# Altium PCB OpenAXES.PcbDoc (part 1 of 2)
Units mm, origin at the board's own origin, x right, y up, seen from the top; angles counter-clockwise.
Board outline 34.5 x 18 mm, 4 copper layers (L1, L2, L3, L4), stack 0.956 mm thick; 99 components, 71 nets, 369 pads, 165 vias.
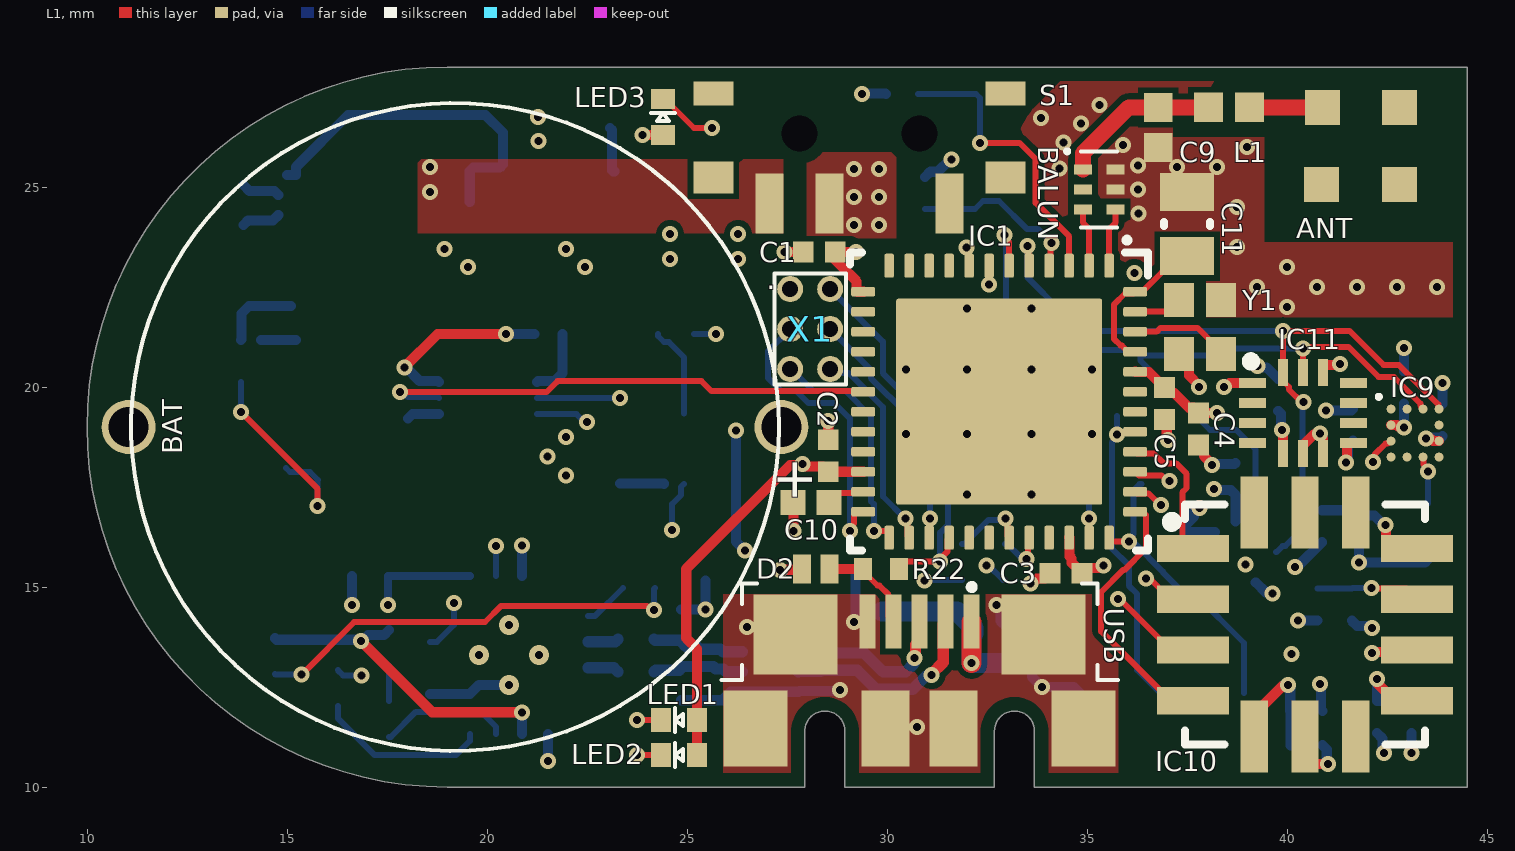
[diagram p0: L1 view]
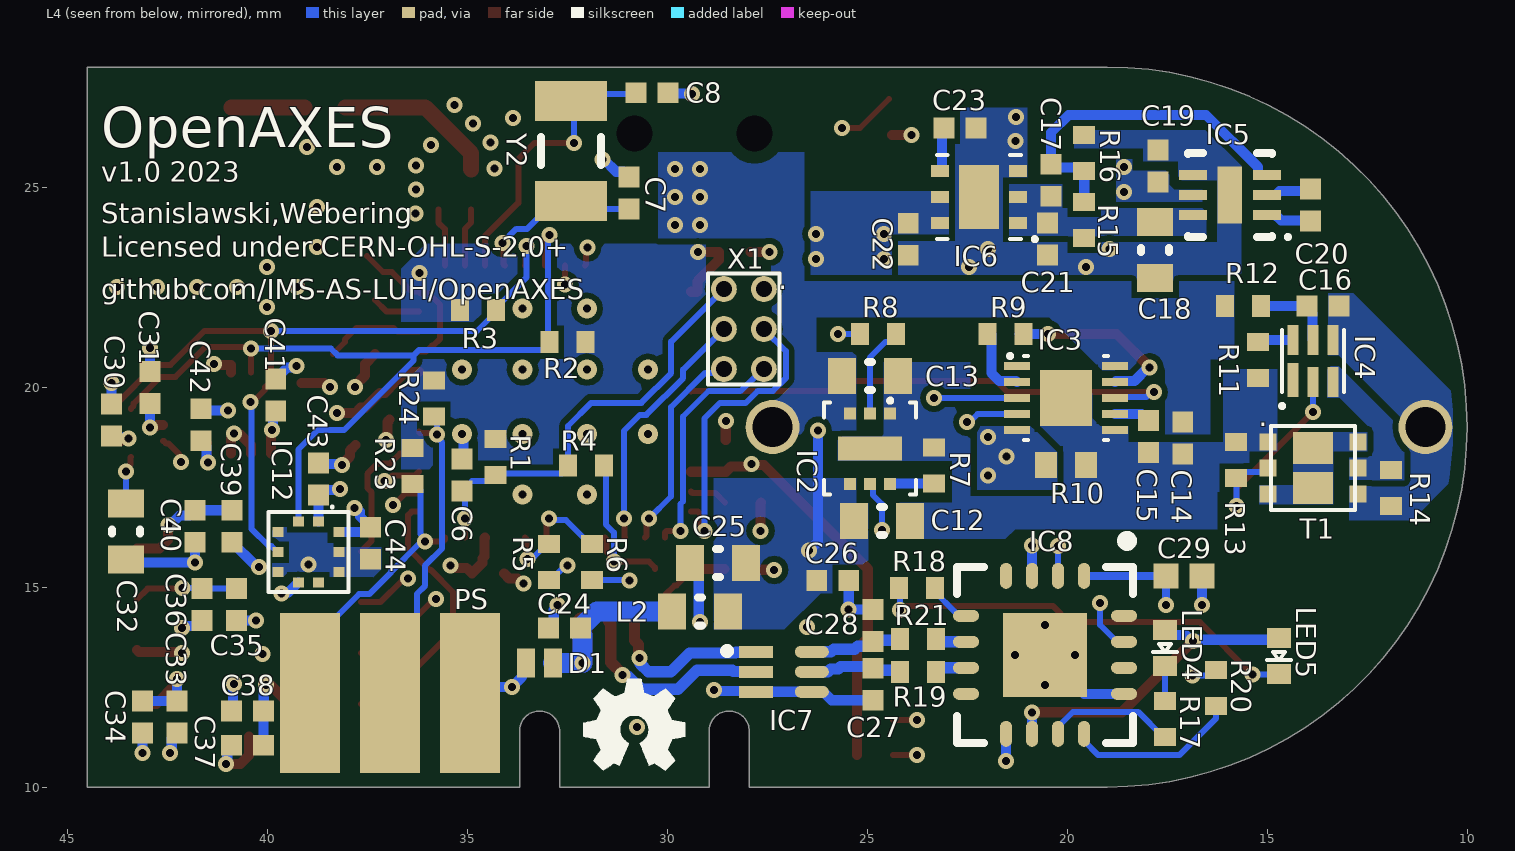
[diagram p1: L4 view, seen from below]
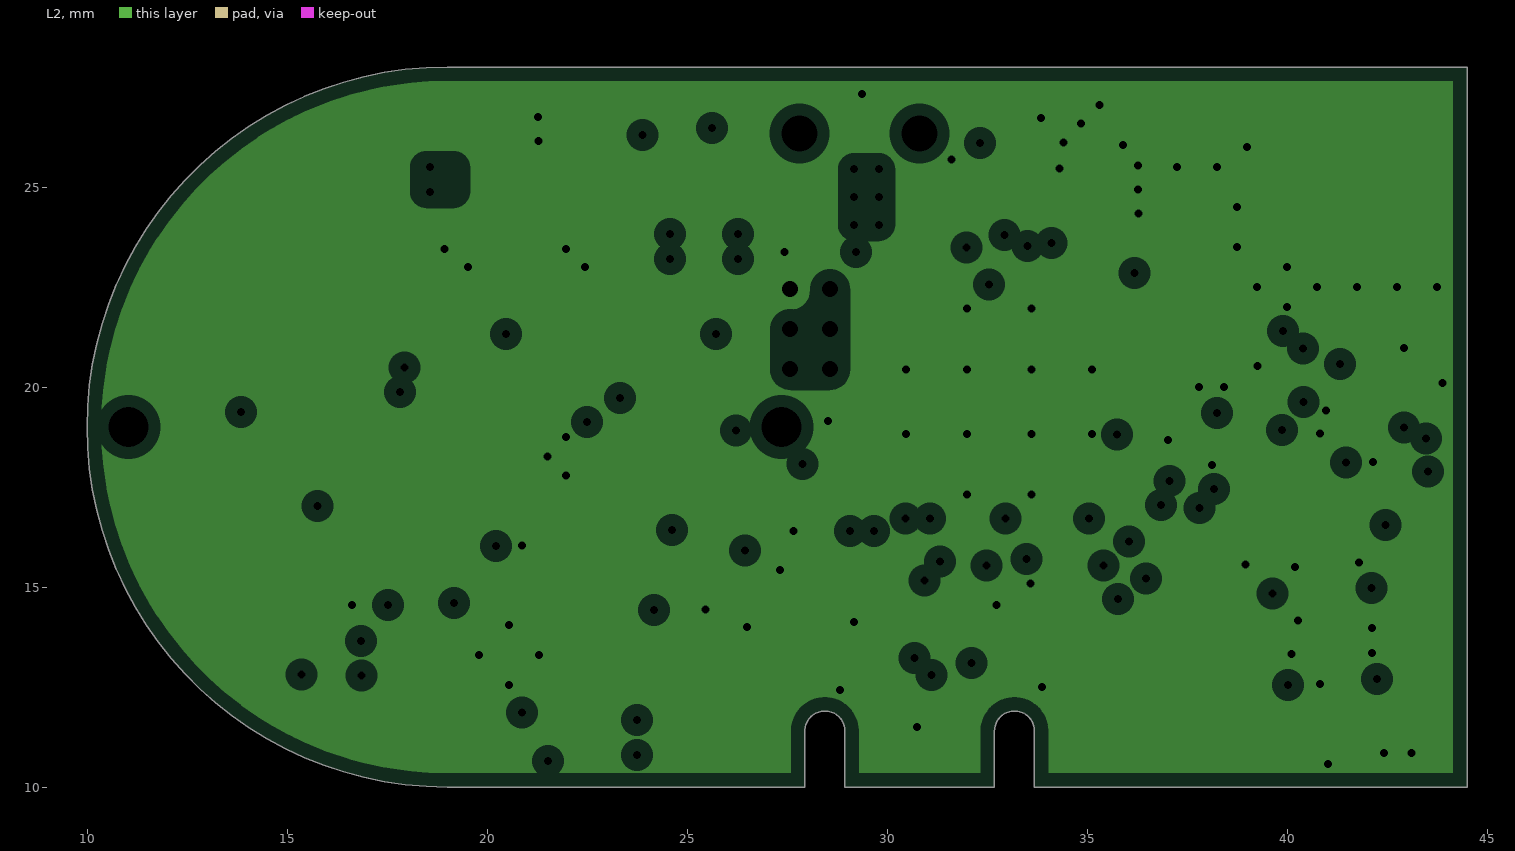
[diagram p2: L2, clearances drawn from the general rule]
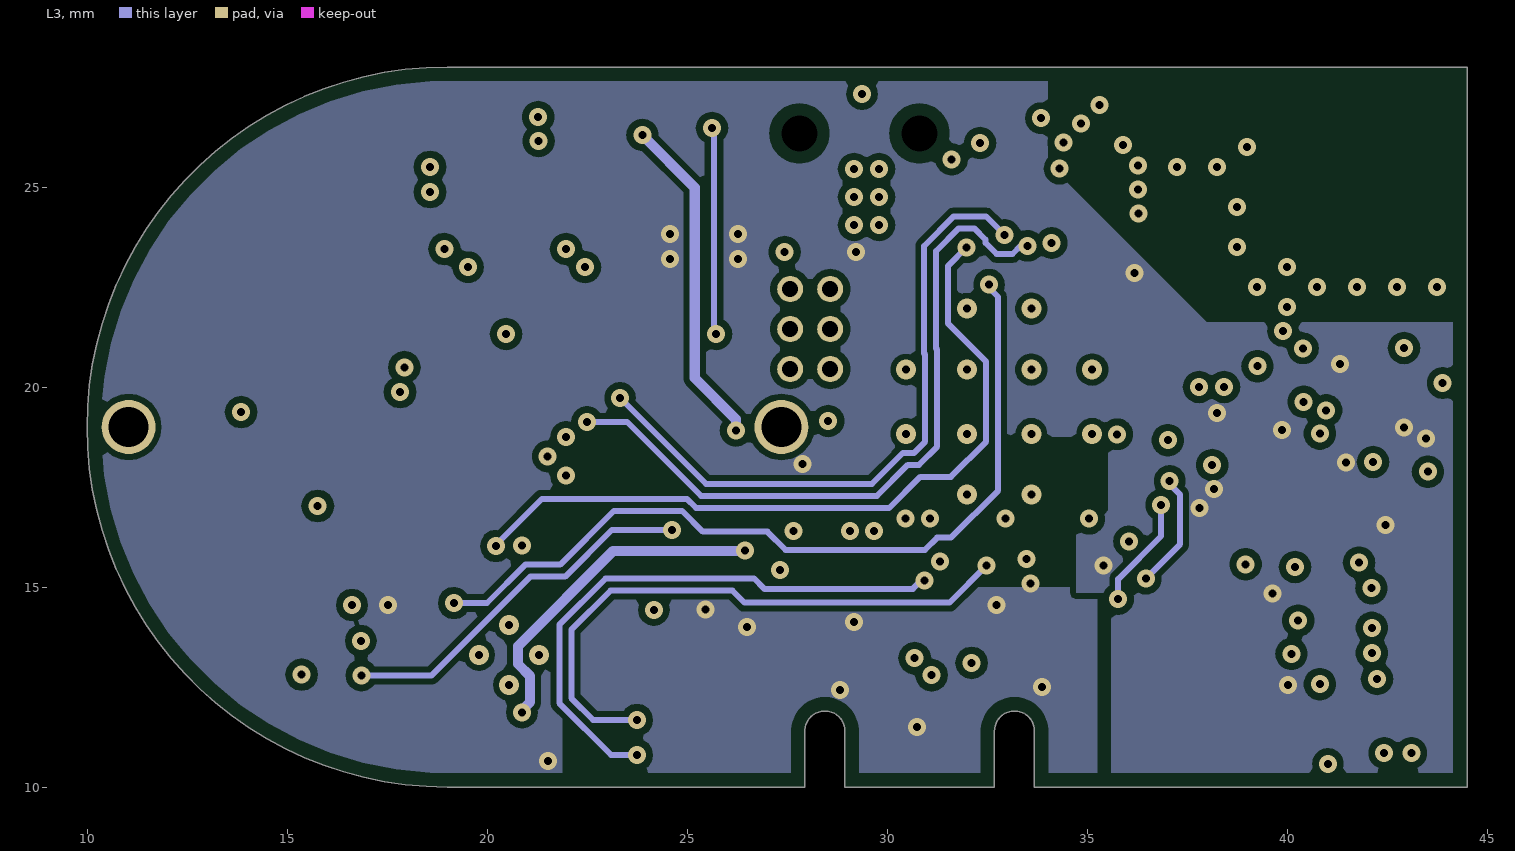
[diagram p3: L3]

## Layer stack, top to bottom
Top Solder: solder mask 0.0102, Solder Resist, Dk 3.5
L1: signal copper 0.035
Dielectric 1: prepreg 0.115, PP-016, Dk 4.4
Dielectric 2: prepreg 0.115, PP-016, Dk 4.4
L2: plane copper 0.035, net GND
Dielectric 3: core 0.3556, Core-032, Dk 4.7
L3: signal copper 0.035
Dielectric 4: prepreg 0.115, PP-016, Dk 4.4
Dielectric 5: prepreg 0.115, PP-016, Dk 4.4
L4: signal copper 0.035
Solder Side: solder mask 0.0102, Solder Resist, Dk 3.5

## Board outline
24.816,10 27.946,10 27.946,11.4 cw(c28.446,11.4) 28.446,11.9 cw(c28.446,11.4) 28.946,11.4 28.946,10 32.686,10 32.686,11.4 cw(c33.186,11.4) 33.186,11.9 cw(c33.186,11.4) 33.686,11.4 33.686,10 44.5,10 44.5,28 19,28 ccw(c19,19) 19,10

## Design rules (kind name [scope] priority, off if disabled: settings)
BoardOutlineClearance BoardOutlineClearance_Exceptions [InComponent('BAT1') or InComponent('S1')] p1: gap=0.15 ignorepadtopadclearanceinfootprint=FALSE
BoardOutlineClearance [All] p2: gap=0.35 ignorepadtopadclearanceinfootprint=FALSE except(0.254: Text-OutlineEdge Text-CavityEdge Text-CutoutEdge Text-SplitBarrior Text-SplitContinuation)
Clearance Clearance_NPTHoles [(HoleDiameter > 0) AND (PadIsPlated = 'False')] p1: gap=0.3 ignorepadtopadclearanceinfootprint=FALSE
Clearance ClearanceL3Traces [IsTrack and (Layer = 'L3')] p2: gap=0.15 ignorepadtopadclearanceinfootprint=FALSE except(0.3: Arc-THPad Arc-Hole Track-THPad Track-Hole SMDPad-THPad SMDPad-Hole THPad-THPad THPad-Hole Via-Hole Fill-Hole Poly-Hole Region-Hole Text-Hole)
Clearance ClearanceL3Polygons [InNamedPolygon('+3V3_L03_P056') OR InNamedPolygon('+3V3_L03_P046') OR  InNamedPolygon('GND_L03_P060')] p3: gap=0.15 ignorepadtopadclearanceinfootprint=FALSE except(0.3: Arc-Via Arc-Hole Track-Via Track-Hole SMDPad-Via THPad-Via Via-Hole Fill-Hole Poly-Hole Region-Hole)
Clearance [All] p4: gap=0.15 ignorepadtopadclearanceinfootprint=FALSE
Clearance Clearance_ViaSameNet [IsVia AND (not IsComponentPrimitive)] p5: gap=0 ignorepadtopadclearanceinfootprint=TRUE except(0.01: SMDPad-Hole; 0.15: Via-Via)
Clearance Clearance_ShieldingVia [IsShieldingVia] p6: gap=0.15 ignorepadtopadclearanceinfootprint=TRUE
DiffPairsRouting DiffPairsRoutingUSB [InDifferentialPair('USB_D') or InDifferentialPair('USBD') or InDifferentialPair('D')] p1: maxlimit=0.15 minlimit=0.127 mostfreqgap=0.15 toplayer_minwidth=0.253 toplayer_maxwidth=0.284 toplayer_prefwidth=0.281 midlayer4_maxgap=0.127 midlayer4_prefgap=0.127 midlayer4_minwidth=0.095 midlayer4_maxwidth=0.096 midlayer4_prefwidth=0.096 bottomlayer_mingap=0.15 bottomlayer_minwidth=0.276 bottomlayer_maxwidth=0.284 bottomlayer_prefwidth=0.281 impedanceprofiledriven=TRUE impedanceprofileid={C6F5AE27-A041-4408-8983-9D974821A2F9} impedanceprofilevalue=90.000000 maxuncoupledlength=12.7
HoleSize [All] p1: absolutevalues=TRUE maxlimit=3.2 minlimit=0.2 maxpercent=80.000 minpercent=20.000
MaxMinImpedance "Schematic Impedance Constraint" [InNetClass('S50')] p1: minimum=45.00 maximum=55.00
MaxMinImpedance [InNetClass('DIFF90')] p2: minimum=81.00 maximum=99.00
MinimumAnnularRing [((ObjectKind = 'Pad') OR (ObjectKind = 'Via')) And (Layer = 'MultiLayer')] p1: minimumring=0.1
MinimumSolderMaskSliver [All] p1: minsoldermaskwidth=0.1
PlaneClearance [All] p1: clearance=0.3
PlaneConnect [All] p1: planeconnectstyle=Direct reliefexpansion=0.508 reliefentries=4 reliefconductorwidth=0.254 reliefairgap=0.254
PolygonConnect [All] p1: connectstyle=Direct reliefconductorwidth=0.254 reliefentries=4 polygonreliefangle="90 Angle" airgapwidth=0.254
RoutingVias [All] p1: holewidth=0.3 width=0.6 viastyle="Through Hole" minholewidth=0.2 minwidth=0.4 maxholewidth=0.711 maxwidth=1.27 useviatemplates=TRUE viatemplateguid#1={DDB32D80-8653-42E7-85F9-05E0B8A0FFCF} viatemplatename#1=v40h20z0
SilkToSilkClearance [All] p1: silktosilkclearance=0
SilkToSolderMaskClearance [IsPad] p1: minsilkscreentomaskgap=0.01 clearancetoexposedcopper=TRUE
SolderMaskExpansion SolderMaskExpansion_1 [IsVia] p1: expansion=-2 istentingtop=FALSE
SolderMaskExpansion [All] p2: expansion=0 istentingtop=FALSE
Width Impedance_50Ohm [InNetClass('S50')] p1: maxlimit=0.737 minlimit=0.186 preferedwidth=0.399 toplayer_minwidth=0.35 midlayer4_maxwidth=0.392 midlayer4_prefwidth=0.19 bottomlayer_minwidth=0.388 impedanceprofiledriven=TRUE impedanceprofileid={7875F6EE-BFEB-4626-A73D-AADCFB6D67AE} impedanceprofilevalue=50.000000 minimp=50.000000 maximp=50.000000 favimp=50.000000
Width "Schematic Width Constraint_3" [InNet('+5V')] p2: maxlimit=0.5 minlimit=0.254 preferedwidth=0.254
Width "Schematic Width Constraint_2" [InNet('USB_V+')] p3: maxlimit=0.5 minlimit=0.254 preferedwidth=0.254
Width [All] p4: maxlimit=5 minlimit=0.15 preferedwidth=0.254
23 further rules are at their usual default settings.

## Classes and differential pairs
net class S50: ANT UNBALANCED
component class Sensors: C30 C31 C32 C33 C34 C35 C36 C37 C38 C39 C40 C41 C42 C43 C44 IC9 IC10 IC11 IC12 PS R23 R24
net class DIFF90: D_N D_P USB_D_N USB_D_P USBD_N USBD_P
component class USB2UART: C24 C25 C26 C27 C28 C29 D1 D2 IC7 IC8 L2 LED4 LED5 R17 R18 R19 R20 R21 R22 USB
component class Battery: BAT BAT? C12 C13 C14 C15 C16 C17 C18 C19 C20 C21 C22 C23 IC2 IC3 IC4 IC5 IC6 LED3 R7 R8 R9 R10 R11 R12 R13 R14 R15 R16 S1 T1
component class SoC: ANT BALUN C1 C2 C3 C4 C5 C6 C7 C8 C9 C10 C11 IC1 L1 LED1 LED2 R1 R2 R3 R4 R5 R6 X1 Y1 Y2
differential pair USB_D: +USB_D_P -USB_D_N
differential pair D: +D_P -D_N
differential pair USBD: +USBD_P -USBD_N

## Components (designator, comment, footprint, x,y, rotation, side; value= is the part's Value field where it differs from the comment)
ANT "ANTENNA" MOLEX_47948-0001 41.85,26.025 r90 top locked
BALUN "2450BM14G0011" SON50P80X70-6L 35.304,24.944 r0 top
BAT "CP1654 A3" CP1654 19.2,19 r0 top locked
C1 "100n 16V 0402" CAPC0402(1005)60_L 28.305,23.375 r0 top value=100nF
C2 "100n 16V 0402" CAPC0402(1005)60_L 28.53,18.282 r270 top value=100nF
C3 "100n 16V 0402" CAPC0402(1005)60_L 34.478,15.342 r0 top value=100nF
C4 "10u 6V3 0402" CAPC0402(1005)60_L 37.79,18.95 r90 top value=10uF
C5 "100n 16V 0402" CAPC0402(1005)60_L 36.935,19.585 r90 top value=100nF
C6 "100n 16V 0402" CAPC0402(1005)60_L 35.124,17.8 r270 bottom value=100nF
C7 "12p 10V 0402" CAPC0402(1005)60_L 30.95,24.85 r270 bottom value=12pF
C8 "12p 10V 0402" CAPC0402(1005)60_L 30.375,27.355 r0 bottom value=12pF
C9 "1p3 10V 0402" CAPC0402(1005)60_M 36.779,26.49 r90 top value=1.3pF
C10 "1u 16V 0402" CAPC0402(1005)60_N 28.1,17.11 r0 top value=1uF
C11 "CAP 22u 6.3V 0805" CAPC0805(2012)145_L 37.5,24.075 r270 top value=22uF
C12 "4u7 10V 0603" CAPC0603(1608)100_L 24.625,16.655 r0 bottom value=4.7uF
C13 "4u7 10V 0603" CAPC0603(1608)100_L 24.925,20.275 r0 bottom value=4.7uF
C14 "100n 16V 0402" CAPC0402(1005)60_L 17.107,18.725 r90 bottom value=100nF
C15 "470n 6V3 0402" CAPC0402(1005)60_L 17.961,18.762 r90 bottom value=470nF
C16 "100n 16V 0402" CAPC0402(1005)60_L 13.6,22.025 r0 bottom value=100nF
C17 "220p 10V 0402" CAPC0402(1005)60_L 20.4,25.17 r270 bottom value=220pF
C18 "4u7 10V 0603" CAPC0603(1608)100_L 17.8,23.422 r90 bottom value=4.7uF
C19 "2u2u 6V3 0402" CAPC0402(1005)60_L 17.725,25.525 r270 bottom value=2.2uF
C20 "1u 16V 0402" CAPC0402(1005)60_L 13.91,24.55 r270 bottom value=1uF
C21 "10u 6V3 0402" CAPC0402(1005)60_L 20.485,23.7 r90 bottom value=10uF
C22 "10u 6V3 0402" CAPC0402(1005)60_L 23.968,23.695 r90 bottom value=10uF
C23 "1u 16V 0402" CAPC0402(1005)60_L 22.675,26.475 r180 bottom value=1uF
C24 "10n 16V 0402" CAPC0402(1005)33_L 32.566,13.975 r180 bottom value=10nF
C25 "4u7 10V 0603" CAPC0603(1608)100_L 28.72,15.595 r180 bottom value=4.7uF
C26 "100n 16V 0402" CAPC0402(1005)60_L 25.858,15.16 r0 bottom value=100nF
C27 "47p 16V 0402" CAPC0402(1005)60_L 24.85,12.568 r90 bottom value=47pF
C28 "47p 16V 0402" CAPC0402(1005)60_L 24.85,14.038 r270 bottom value=47pF
C29 "100n 16V 0402" CAPC0402(1005)60_N 17.075,15.278 r0 bottom value=100nF
C30 "1u 16V 0402" CAPC0402(1005)60_L 43.89,19.175 r90 bottom value=1uF
C31 "1u 16V 0402" CAPC0402(1005)60_L 42.925,19.988 r90 bottom value=1uF
C32 "4u7 10V 0603" CAPC0603(1608)100_L 43.522,16.39 r90 bottom value=4.7uF
C33 "100n 16V 0402" CAPC0402(1005)60_L 42.25,11.75 r90 bottom value=100nF
C34 "1u 16V 0402" CAPC0402(1005)60_L 43.11,11.75 r270 bottom value=1uF
C35 "1u 16V 0402" CAPC0402(1005)60_L 40.765,14.56 r270 bottom value=1uF
C36 "100n 16V 0402" CAPC0402(1005)60_L 41.622,14.56 r90 bottom value=100nF
C37 "1u 16V 0402" CAPC0402(1005)60_L 40.488,11.045 r0 bottom value=1uF
C38 "100n 16V 0402" CAPC0402(1005)60_L 40.488,11.9 r180 bottom value=100nF
C39 "1u 16V 0402" CAPC0402(1005)60_L 40.875,16.52 r270 bottom value=1uF
C40 "100n 16V 0402" CAPC0402(1005)60_L 41.8,16.52 r90 bottom value=100nF
C41 "100n 16V 0402" CAPC0402(1005)60_L 39.78,19.8 r270 bottom value=100nF
C42 "100n 16V 0402" CAPC0402(1005)60_L 41.65,19.055 r270 bottom value=100nF
C43 "100n 16V 0402" CAPC0402(1005)60_L 38.715,17.7 r270 bottom value=100nF
C44 "100n 16V 0402" CAPC0402(1005)60_L 37.41,16.095 r90 bottom value=100nF
D1 "TPD1E10B06DPYR" DPY0002A_M 33.19,13.103 r0 bottom
D2 "TPD1E10B06DPYR" DPY0002A_M 28.22,15.45 r180 top
IC1 "CC2652R1FRGZT" RGZ0048A_V 32.804,19.632 r270 top
IC2 "MCP73830/L" PSON50P200X80_HS-7L 24.925,18.457 r270 bottom
IC3 "MAX17055ETB+" PSON40P250X80_HS-11L 20.025,19.725 r180 bottom
IC4 "BQ2970x" SON50P150X80-6L 13.85,20.65 r90 bottom
IC5 "LTC3221EDC" LT-DC6-6_V 15.93,24.8 r0 bottom
IC6 "TPS7A3501" PSON65P200X80_HS-7L 22.205,24.745 r0 bottom
IC7 "ECMF02-2AMX6" SON50P150X170X55-6N-D 27.08,12.88 r180 bottom
IC8 "FT230XQ-R" QFN-16_L 20.55,13.303 r270 bottom
IC9 "MMC3416XPJ" BGA12C40P4X4_160X160X72 43.2,18.85 r0 top
IC10 "ADXL355BEZ" ADI-ADXL355-LCC-14_V 40.45,14.06 r0 top
IC11 "BMI160" BOSC-BMI160_V 40.4,19.35 r0 top
IC12 "BMP388" BMP388 38.965,15.875 r180 bottom
L1 "LQP15MN1N8B02D" INDC1005X45X25ML10T10 38.55,26.99 r0 top
L2 "742792605" 0603(1608)_L 29.18,14.39 r180 bottom
LED1 "GREEN" LED_0402 24.8,11.675 r270 top
LED2 "RED" LED_0402 24.8,10.8 r270 top
LED3 "BLUE" LED_0402 24.4,26.75 r180 top
LED4 "ORANGE" LED_0402 17.55,13.475 r180 bottom
LED5 "YELLOW" LED_0402 14.7,13.27 r180 bottom
PS "PressureSensor" PRESSURESENSOR 36.925,12.35 r270 bottom
R1 "10K 1% 0402" RESC0402(1005)_L 34.293,18.25 r90 bottom value="10000.00 Ohm"
R2 "10K 1% 0402" RESC0402(1005)_L 32.49,21.12 r180 bottom value="10000.00 Ohm"
R3 "10K 1% 0402" RESC0402(1005)_L 34.725,21.925 r0 bottom value="10000.00 Ohm"
R4 "Jumper 0402" RESC0402(1005)_L 32.03,18.04 r180 bottom value="0.00 Ohm"
R5 "3K3 5% 0402" RESC0402(1005)_L 32.955,15.625 r270 bottom value="3300.00 Ohm"
R6 "3K3 5% 0402" RESC0402(1005)_L 31.88,15.625 r270 bottom value="3300.00 Ohm"
R7 "1K2 1% 0402" RESC0402(1005)_L 23.326,18.034 r270 bottom value="1200.00 Ohm"
R8 "3K3 5% 0402" RESC0402(1005)_L 24.725,21.325 r180 bottom value="3300.00 Ohm"
R9 "10K 1% 0402" RESC0402(1005)_L 21.541,21.325 r180 bottom value="10000.00 Ohm"
R10 "0R01 5% 0402" R0402 20.025,18.055 r0 bottom
R11 "2K2 5% 0402" RESC0402(1005)_L 15.225,20.675 r90 bottom value="2200.00 Ohm"
R12 "330R 5% 0402" RESC0402(1005)_L 15.6,22.025 r0 bottom value="330.00 Ohm"
R13 "4M99 1% 0402" RESC0402(1005)_L 15.775,18.175 r270 bottom value="4990000.00 Ohm"
R14 "4M99 1% 0402" RESC0402(1005)_L 11.9,17.475 r90 bottom value="4990000.00 Ohm"
R15 "47K 1% 0402" RESC0402(1005)_L 19.57,24.175 r270 bottom value="47000.00 Ohm"
R16 "24K3 1% 0402" RESC0402(1005)_L 19.57,25.85 r270 bottom value="24300.00 Ohm"
R17 "3K3 5% 0402" RESC0402(1005)_L 17.55,11.706 r90 bottom value="3300.00 Ohm"
R18 "3K3 5% 0402" RESC0402(1005)_L 23.75,14.975 r0 bottom value="3300.00 Ohm"
R19 "27R 5% 0402" RESC0402(1005)_L 23.725,12.878 r180 bottom value="27.00 Ohm"
R20 "Jumper 0402" RESC0402(1005)_L 16.27,12.47 r90 bottom value="0.00 Ohm"
R21 "27R 5% 0402" RESC0402(1005)_L 23.725,13.698 r180 bottom value="27.00 Ohm"
R22 "Jumper 0402" RESC0402(1005)_L 29.85,15.45 r0 top value="0.00 Ohm"
R23 "10K 1% 0402" RESC0402(1005)_L 36.366,18.024 r90 bottom value="10000.00 Ohm"
R24 "10K 1% 0402" RESC0402(1005)_L 35.827,19.715 r90 bottom value="10000.00 Ohm"
S1 "SWITCH_SPDT" SSSS810701_MODIFIED 29.31,26.34 r180 top
T1 "DUAL_NMOS" "WDFN6 2X2, 0.65P" 13.85,17.975 r90 bottom
USB "HIRO-ZX62R-B-5P-5" HIRO-ZX62R-B-5P_V 30.816,12.8 r0 top
X1 "CON_6P2R" JTAG_CON 28.08,21.45 r0 top
Y1 "NX2016SA-48M" Crystal_2016 37.825,21.5 r270 top
Y2 "FC-135-32.76" EPSON-FC-135_V 32.4,25.9 r90 bottom

## Footprints (in the part's own frame and the unit in brackets; to place one, negate y for a bottom-side part, rotate by r counter-clockwise, add the part's x,y. Pads: shape width x height; smd on the part's side, far side on the other; paste and mask are expansions set on the pad)
0603(1608)_L [mm] "Generic 0603 Package - High Density"
  rect 0.7x0.9 smd: 1(-0.7,0) 2(0.7,0)
  silkscreen extent -0.05,-0.35 0.05,0.35, body extent -0.85,-0.47 0.85,0.47, height 0.8
ADI-ADXL355-LCC-14_V [mm] "LCC, 14-Leads, Body 6x6mm, Pitch 1.27mm"
  rect 1.8x0.68 smd: 1(-2.8,1.905) 2(-2.8,0.635) 3(-2.8,-0.635) 4(-2.8,-1.905) 8(2.8,-1.905) 9(2.8,-0.635) 10(2.8,0.635) 11(2.8,1.905)
  rect 0.68x1.8 smd: 5(-1.27,-2.8) 6(0,-2.8) 7(1.27,-2.8) 12(1.27,2.8) 13(0,2.8) 14(-1.27,2.8)
  silkscreen extent -3.45,-3 3,3, body extent -3,-3 3,3, height 2.2
BGA12C40P4X4_160X160X72 [mm] "BGA, 12-Leads, Body 1,60x1,60mmx0,72mm, Pitch 0,40mm"
  round 0.22 smd: 1(-0.6,0.6) 2(-0.2,0.6) 3(0.2,0.6) 4(0.6,0.6) 5(0.6,0.2) 6(0.6,-0.2) 7(0.6,-0.6) 8(0.2,-0.6) 9(-0.2,-0.6) 10(-0.6,-0.6) 11(-0.6,-0.2) 12(-0.6,0.2)
  silkscreen extent -0.95,0.86 -0.85,0.95, body extent -0.8,-0.8 0.8,0.8, height 0.72
BMP388 [mm]
  rect 0.275x0.25 smd: 1(0.25,0.763) 2(-0.25,0.763) 3(-0.763,0.5) 4(-0.763,0) 5(-0.763,-0.5) 6(-0.25,-0.763) 7(0.25,-0.763) 8(0.763,-0.5) 9(0.763,0) 10(0.763,0.5)
  silkscreen extent -1,-1 1,1.14, body extent -1,-1 1,1, height 0.8
BOSC-BMI160_V [mm] "PQFN, 14-Leads, Body 3x2.5mm, Pitch 0.5mm"
  rect 0.675x0.25 smd: 1(-1.262,0.75) 2(-1.262,0.25) 3(-1.262,-0.25) 4(-1.262,-0.75) 8(1.262,-0.75) 9(1.262,-0.25) 10(1.262,0.25) 11(1.262,0.75)
  rect 0.25x0.675 smd: 5(-0.5,-1.012) 6(0,-1.012) 7(0.5,-1.012) 12(0.5,1.012) 13(0,1.012) 14(-0.5,1.012)
  silkscreen extent -1.4,1.19 -1.2,1.39, body extent -1.5,-1.25 1.5,1.25, height 0.88
CAPC0402(1005)33_L [mm] "Chip Capacitor, Body 1.0x0.5mm, Height 0.33mm, IPC High Density"
  rect 0.52x0.52 smd: 1(-0.4,0) 2(0.4,0)
  body extent -0.55,-0.3 0.55,0.3, height 0.33
CAPC0402(1005)60_L [mm] "Chip Capacitor, Body 1.0x0.5mm, Height 0.6mm, IPC High Density"
  rect 0.52x0.52 smd: 1(-0.4,0) 2(0.4,0)
  body extent -0.55,-0.3 0.55,0.3, height 0.6
CAPC0402(1005)60_M [mm] "Chip Capacitor, Body 1.0x0.5mm, Height 0.6mm, IPC Low Density"
  rect 0.72x0.72 smd: 1(-0.5,0) 2(0.5,0)
  body extent -0.55,-0.3 0.55,0.3, height 0.6
CAPC0402(1005)60_N [mm] "Chip Capacitor, Body 1.0x0.5mm, Height 0.6mm, IPC Medium Density"
  rect 0.62x0.62 smd: 1(-0.45,0) 2(0.45,0)
  body extent -0.55,-0.3 0.55,0.3, height 0.6
CAPC0603(1608)100_L [mm] "Chip Capacitor, Body 1.6x0.8mm, Height 1.0mm, IPC High Density"
  rect 0.7x0.9 smd: 1(-0.7,0) 2(0.7,0)
  silkscreen extent -0.05,-0.35 0.05,0.35, body extent -0.87,-0.47 0.88,0.48, height 1
CAPC0805(2012)145_L [mm] "Chip Capacitor, Body 2.0x1.2mm, Height 1.45mm, IPC High Density"
  rect 0.95x1.35 smd: 1(-0.8,0) 2(0.8,0)
  silkscreen extent -0.05,-0.58 0.05,0.58, body extent -1.1,-0.72 1.1,0.72, height 1.45
CP1654 [mm]
  round 1.35 hole 1: BAT+(8.16,0) BAT-(-8.16,0)
  silkscreen extent -8.1,-8.1 8.1,8.1, body extent -8.05,-8.05 8.05,8.05, height 5.76
Crystal_2016 [mm]
  rect 0.85x0.75 smd: 1(-0.675,-0.525) 2(0.675,-0.525) 3(0.675,0.525) 4(-0.675,0.525)
  body extent -1,-0.8 1,0.8, height 0.5
DPY0002A_M [mm] "DFN, 2-Leads, Body 1.0x0.6x0.4mm, IPC Low Density"
  rect 0.45x0.72 smd: 1(-0.34,0) 2(0.34,0)
  body extent -0.5,-0.3 0.5,0.3, height 0.4
EPSON-FC-135_V [mm] "SMD, 2-Leads, Body 3.2x1.5mm"
  rect 1x1.8 smd: 1(-1.25,0) 2(1.25,0)
  silkscreen extent -0.35,-0.75 0.35,0.75, body extent -1.6,-0.75 1.6,0.75, height 0.9
HIRO-ZX62R-B-5P_V [mm] "USB Micro-B R/A Connector"
  rect 0.4x1.35 smd: 1(1.3,1.338) 2(0.65,1.338) 3(0,1.338) 4(-0.65,1.338) 5(-1.3,1.338)
  rect 2.1x2 smd: 6(-3.1,1.012) 11(3.1,1.012)
  rect 1.6x1.9 smd: 7(-4.1,-1.338) 10(4.1,-1.338)
  rect 1.2x1.9 smd: 8(-0.85,-1.338) 9(0.85,-1.338)
  silkscreen extent -4.95,-0.13 4.95,2.29, body extent -4.4,-3.95 4.4,1.78, height 2.71
INDC1005X45X25ML10T10 [mm] "Chip Inductor, 2-Leads, Body 1.1x0.6mm, IPC Low Density"
  rect 0.73x0.74 smd: 1(-0.515,0) 2(0.515,0)
  body extent -0.55,-0.3 0.55,0.3, height 0.45
JTAG_CON [mm]
  round 0.65 hole 0.4 mask+0: 1(-0.5,1) 2(-0.5,0) 3(-0.5,-1) 4(0.5,1) 5(0.5,0) 6(0.5,-1)
  silkscreen extent -0.89,-1.39 0.89,1.39
LED_0402 [mm]
  rect 0.6x0.5 smd: ANODE(0,0.45) CATHODE(0,-0.45)
  silkscreen extent -0.3,-0.1 0.3,0.1, body extent -0.3,-0.5 0.3,0.5, height 0.2
LT-DC6-6_V [mm] "SON, 6-Leads, Body 2x2mm, Pitch 0.5mm, Thermal Pad 1.42x0.61mm"
  rect 0.7x0.25 smd: 1(-0.925,0.5) 2(-0.925,0) 4(0.925,-0.5) 5(0.925,0) 6(0.925,0.5)
  rect 0.7x0.25 smd paste+0: 3(-0.925,-0.5)
  rect 0.61x1.42 smd: 7(0,0)
  silkscreen extent -1.5,-1.05 1.05,1.1, body extent -1,-1 1,1, height 0.8
MOLEX_47948-0001 [mm] "2.4GHz SMT On-ground MID Chip Antenna"
  rect 0.87x0.87 smd: ANTENNA(0.965,0.965) "SOLDER PAD"(-0.965,-0.965) "SOLDER PAD"(-0.965,0.99) "SOLDER PAD"(0.965,-0.965)
  body extent -1.57,-1.57 1.57,1.57, height 4.01
PRESSURESENSOR [mm]
  rect 4x1.5 smd paste-1 mask+0: 1(0,2) 2(0,0) 3(0,-2)
PSON40P250X80_HS-11L [mm] "PSON, 10-Leads, Body 2,00x2,50mm, Pitch 0,40mm, Thermal Pad 1,40x1,30mm, IPC High Density"
  rect 0.65x0.2 smd: 1(-1.225,0.8) 2(-1.225,0.4) 3(-1.225,0) 4(-1.225,-0.4) 5(-1.225,-0.8) 6(1.225,-0.8) 7(1.225,-0.4) 8(1.225,0) 9(1.225,0.4) 10(1.225,0.8)
  rect 1.3x1.4 smd paste-0.65: 11(0,0)
  silkscreen extent -1.45,-1.05 1.05,1.1, body extent -1.25,-1 1.25,1, height 0.8
PSON50P200X80_HS-7L [mm] "PSON, 6-Leads, Body 2,00x2,00mm, Pitch 0,50mm, Thermal Pad 1,60x0,60mm, IPC High Density"
  rect 0.3x0.3 smd: 1(-0.88,0.5) 2(-0.88,0) 3(-0.88,-0.5) 4(0.88,-0.5) 5(0.88,0) 6(0.88,0.5)
  rect 0.6x1.6 smd paste-0.3: 7(0,0)
  silkscreen extent -1.25,-1.15 1.15,1.15, body extent -1.05,-1.05 1.05,1.05, height 0.8
PSON65P200X80_HS-7L [mm] "PSON, 6-Leads, Body 2,00x2,00mm, Pitch 0,65mm, Thermal Pad 1,60x1,00mm, IPC High Density"
  rect 0.45x0.3 smd: 1(-0.975,0.65) 2(-0.975,0) 3(-0.975,-0.65) 4(0.975,-0.65) 5(0.975,0) 6(0.975,0.65)
  rect 1x1.6 smd: 7(0,0)
  silkscreen extent -1.45,-1.05 1.05,1.1, body extent -1.05,-1.05 1.05,1.05, height 0.8
QFN-16_L [mm] "QFN, 16-Leads, Body 4x4mm, Pitch 0.65mm, Thermal Pad 2.1x2.1mm, IPC High Density"
  oval 0.65x0.3 smd: 1(-1.975,0.975) 2(-1.975,0.325) 3(-1.975,-0.325) 4(-1.975,-0.975) 9(1.975,-0.975) 10(1.975,-0.325) 11(1.975,0.325) 12(1.975,0.975)
  oval 0.3x0.65 smd: 5(-0.975,-1.975) 6(-0.325,-1.975) 7(0.325,-1.975) 8(0.975,-1.975) 13(0.975,1.975) 14(0.325,1.975) 15(-0.325,1.975) 16(-0.975,1.975)
  rect 2.1x2.1 smd paste-1.05: 17(0,0)
  silkscreen extent -2.97,-2.2 2.2,2.2, body extent -2.05,-2.05 2.05,2.05, height 0.8
R0402 [mm]
  rect 0.55x0.65 smd: 1(-0.5,0) 2(0.5,0)
  body extent -0.52,-0.27 0.53,0.28, height 0.4
RESC0402(1005)_L [mm] "Chip Resistor, Body 1.0x0.5mm, IPC High Density"
  rect 0.45x0.55 smd: 1(-0.45,0) 2(0.45,0)
  body extent -0.52,-0.27 0.53,0.28, height 0.4
RGZ0048A_V [mm] "QFN, 48-Leads, Body 7x7mm, Pitch 0.5mm, Thermal Pad 5.15X5.15mm, TI recommended"
  rrect42% 0.6x0.24 smd: 1(-3.4,2.75) 2(-3.4,2.25) 3(-3.4,1.75) 4(-3.4,1.25) 5(-3.4,0.75) 6(-3.4,0.25) 7(-3.4,-0.25) 8(-3.4,-0.75) 9(-3.4,-1.25) 10(-3.4,-1.75) 11(-3.4,-2.25) 12(-3.4,-2.75) 25(3.4,-2.75) 26(3.4,-2.25) 27(3.4,-1.75) 28(3.4,-1.25) 29(3.4,-0.75) 30(3.4,-0.25) 31(3.4,0.25) 32(3.4,0.75) 33(3.4,1.25) 34(3.4,1.75) 35(3.4,2.25) 36(3.4,2.75)
  rrect42% 0.24x0.6 smd: 13(-2.75,-3.4) 14(-2.25,-3.4) 15(-1.75,-3.4) 16(-1.25,-3.4) 17(-0.75,-3.4) 18(-0.25,-3.4) 19(0.25,-3.4) 20(0.75,-3.4) 21(1.25,-3.4) 22(1.75,-3.4) 23(2.25,-3.4) 24(2.75,-3.4) 37(2.75,3.4) 38(2.25,3.4) 39(1.75,3.4) 40(1.25,3.4) 41(0.75,3.4) 42(0.25,3.4) 43(-0.25,3.4) 44(-0.75,3.4) 45(-1.25,3.4) 46(-1.75,3.4) 47(-2.25,3.4) 48(-2.75,3.4)
  rrect2% 5.15x5.15 smd paste-2.6: 49(0,0)
  silkscreen extent -3.72,-3.72 3.72,3.72, body extent -3.58,-3.57 3.57,3.58, height 1.01
SON50P80X70-6L [mm] "SON, 6-Leads, Body 1,60x0,80mm, Pitch 0,50mm, IPC High Density"
  rect 0.45x0.25 smd: 1(-0.41,0.5) 2(-0.41,0) 3(-0.41,-0.5) 4(0.41,-0.5) 5(0.41,0) 6(0.41,0.5)
  silkscreen extent -0.85,-0.95 0.45,1, body extent -0.45,-0.85 0.45,0.85, height 0.7
SON50P150X80-6L [mm] "SON, 6-Leads, Body 1,50x1,50mm, Pitch 0,50mm, IPC High Density"
  rect 0.85x0.28 smd: 1(-0.475,0.5)
  rect 0.75x0.28 smd: 2(-0.525,0) 3(-0.525,-0.5) 4(0.525,-0.5) 5(0.525,0) 6(0.525,0.5)
  silkscreen extent -1.17,-0.78 0.77,0.82, body extent -0.77,-0.77 0.77,0.77, height 0.8
SON50P150X170X55-6N-D [mm]
  rect 0.85x0.3 smd: 1(-0.7,0.5) 2(-0.7,0) 3(-0.7,-0.5)
  oval 0.85x0.3 smd: 4(0.7,-0.5) 5(0.7,0) 6(0.7,0.5)
  silkscreen extent -1.47,0.47 -1.37,0.57, body extent -0.8,-0.85 0.8,0.85, height 0.55
SSSS810701_MODIFIED [mm]
  rect 0.7x1.5 smd: 1(-2.25,1.75) 2(0.75,1.75) 3(2.25,1.75)
  rect 1x0.6 smd: MOUNT(-3.65,-1) MOUNT(3.65,-1)
  rect 1x0.8 smd: MOUNT(-3.65,1.1) MOUNT(3.65,1.1)
  round 0 hole 0.9 unplated mask+0: MOUNT(-1.5,0) MOUNT(1.5,0)
  body extent -3.35,-2.8 3.35,2.2, height 1.41
"WDFN6 2X2, 0.65P" [mm]
  rect 0.42x0.42 smd: 1(0.65,1.125) 2(0,1.125) 3(-0.65,1.125) 4(-0.65,-1.125) 5(0,-1.125) 6(0.65,-1.125)
  rect 0.8x1 smd: 3(-0.5,0) 6(0.5,0)
  silkscreen extent -1.05,-1.05 1.05,1.05, body extent -1,-1 1,1, height 0.8

## Part data
BAT: library part Battery
C1 C2 C3 C5 C6 C14 C16 C26 C29 C33 C36 C38 C40 C41 C42 C43 C44: library part CMP-1034-02069-1, "CAP 100nF 16V ±10% 0402 (1005 Metric) Thickness 0.6mm SMD", Case-EIA=0402, Case-Metric=1005, Rated Voltage="16 V", Tolerance=Â±10%, Max Thickness="0.6 mm", Technology=SMT
C4 C21 C22: library part CMP-1034-02138-1, "CAP 10uF 6.3V ±20% 0402 (1005 Metric) Thickness 0.6mm SMD", Case-EIA=0402, Case-Metric=1005, Rated Voltage="6.3 V", Tolerance=Â±20%, Max Thickness="0.6 mm", Technology=SMT
C7 C8: library part CMP-1034-00749-1, "CAP 12pF 10V ±1% 0402 (1005 Metric) Thickness 0.6mm SMD", Case-EIA=0402, Case-Metric=1005, Rated Voltage="10 V", Tolerance=Â±1%, Max Thickness="0.6 mm", Technology=SMT
C9: library part CMP-1034-00089-1, "CAP 1.3pF 10V ±0.25pF 0402 (1005 Metric) Thickness 0.6mm SMD", Case-EIA=0402, Case-Metric=1005, Rated Voltage="10 V", Tolerance=Â±0.25pF, Max Thickness="0.6 mm", Technology=SMT
C10 C20 C23 C30 C31 C34 C35 C37 C39: library part CMP-1034-02119-1, "CAP 1uF 16V ±10% 0402 (1005 Metric) Thickness 0.6mm SMD", Case-EIA=0402, Case-Metric=1005, Rated Voltage="16 V", Tolerance=Â±10%, Max Thickness="0.6 mm", Technology=SMT
C11: library part CMP-1036-04938-1, "CAP 22uF 6.3V ±10% 0805 (2012 Metric) Thickness 1.45mm SMD", Case-EIA=0805, Case-Metric=2012, Rated Voltage="6.3 V", Tolerance=Â±10%, Max Thickness="1.45 mm", Technology=SMT
C12 C13 C18 C25 C32: library part CMP-1035-02787-1, "CAP 4.7uF 10V ±20% 0603 (1608 Metric) Thickness 1mm SMD", Case-EIA=0603, Case-Metric=1608, Rated Voltage="10 V", Tolerance=Â±20%, Max Thickness="1 mm", Technology=SMT
C15: library part CMP-1034-02103-1, "CAP 470nF 6.3V ±10% 0402 (1005 Metric) Thickness 0.6mm SMD", Case-EIA=0402, Case-Metric=1005, Rated Voltage="6.3 V", Tolerance=Â±10%, Max Thickness="0.6 mm", Technology=SMT
C17: library part CMP-1034-01354-1, "CAP 220pF 10V ±5% 0402 (1005 Metric) Thickness 0.6mm SMD", Case-EIA=0402, Case-Metric=1005, Rated Voltage="10 V", Tolerance=Â±5%, Max Thickness="0.6 mm", Technology=SMT
C19: library part CMP-1034-02125-1, "CAP 2.2uF 6.3V ±10% 0402 (1005 Metric) Thickness 0.6mm SMD", Case-EIA=0402, Case-Metric=1005, Rated Voltage="6.3 V", Tolerance=Â±10%, Max Thickness="0.6 mm", Technology=SMT
C24: library part CMP-1034-01875-1, "CAP 10nF 16V ±10% 0402 (1005 Metric) Thickness 0.33mm SMD", Case-EIA=0402, Case-Metric=1005, Rated Voltage="16 V", Tolerance=Â±10%, Max Thickness="0.33 mm", Technology=SMT
C27 C28: library part CMP-1034-01081-1, "CAP 47pF 16V ±10% 0402 (1005 Metric) Thickness 0.6mm SMD", Case-EIA=0402, Case-Metric=1005, Rated Voltage="16 V", Tolerance=Â±10%, Max Thickness="0.6 mm", Technology=SMT
D1 D2: library part CMP-0326-00004-2, "ESD in 0402 Package with 10 pF Capacitance and 6 V Breakdown, 1 Channel, -40 to +125 degC, 2-pin X2SON (DPY), Green (RoHS & no Sb/Br)", Breakdown Voltage(Min)(V)=6, IO Capacitance(Typ)(pF)=10, Manufacturer="Texas Instruments", ComponentLink1Description="Manufacturer URL", ComponentLink1URL=http://www.ti.com/, ComponentLink2Description=Datasheet, ComponentLink2URL=http://www.ti.com/general/docs/lit/getliterature.tsp?genericPartNumber=TPD1E10B06&fileType=pdf, ComponentLink3Description="URL Link1", ComponentLink3URL=SamplesURL:http://www.ti.com/product/tpd1e10b06#samples, DatasheetVersion=SLLSEB1, Eco-Plan=TBD, IEC 61000-4-2 Air-Gap(+/- kV)=30, IEC 61000-4-2 Contact(+/- kV)=30, IO Leakage Current(nA)=10, Mounting Technology="Surface Mount", PackageDescription="2-Pin Plastic Small Outline No-Lead 1.0 x 0.6 x 0.4 mm Body", PackageReference=DPY0002A, PackageVersion="revA, Apr-2010", PartNumber=TPD1E10B06DPYR, SubFamily="ESD Solution"
IC1: library part CMP-2000-06080-1, "CC2650 SimpleLink(TM) Multistandard Wireless MCU, 1.8 to 3.8 V, -40 to 85 degC, 48-Pin VFQFN, Green (RoHS & no Sb/Br), Tape and Reel", Manufacturer="Texas Instruments", Maximum Operating Supply Voltage=3.8V, Max Processing Temp=260, Minimum Operating Supply Voltage=1.8V, Operating Supply Voltage=2.5, Operating Temperature=-40to85C, Package Description="48-Pin Quad Flat No-lead Package, Body 7 x 7 mm, Pitch 0.5 mm", Package Reference=RGZ0048A, Category=MicrocontrollerTools, Datasheet URL=http://www.ti.com/lit/ds/symlink/cc2650.pdf, Datasheet Version="Rev. B, 07/2016", Lead Finish=GoldOverNickelPalladium, Manufacturer URL=http://www.ti.com/, Maximum Speed=48MHz, Mounting=SurfaceMount, Mounting Technology=SurfaceMount, Program Memory Size=128KB, RAM Size=30KB, Screening Level=Industrial
IC5: library part CMP-0475-00008-3, "Micropower, Regulated Charge Pump, 1.8 to 5.5 V Vin, Adjustable Vout, 6-pin SON (DC6-6), -40 to 85 degC", Frequency(kHz)=600, Manufacturer="Linear Technology", Code_JEDEC=MO-229, ComponentLink1Description="Manufacturer URL", ComponentLink1URL=http://www.linear.com/, ComponentLink2Description=Datasheet, ComponentLink2URL=http://cds.linear.com/docs/en/datasheet/3221f.pdf, ComponentLink3Description="Package Specification", ComponentLink3URL=http://cds.linear.com/docs/en/packaging/DFN_6_05-08-1703.pdf, Isupply(mA)=0.005, Max Iout(mA)=60, Mounting Technology="Surface Mount", PackageDescription="6-Pin Plastic DFN, Body 2 x 2 mm, Pitch 0.5 mm", PackageReference=DC6-6, PackageVersion="Rev. B, 06/2010", PartNumber=LTC3221EDC, RoHS=FALSE, Vin Max(V)=5.5, Vin Min(V)=1.8, Voutput=Adj
IC7: "Integrated Circuit", Manufacturer_Name=STMicroelectronics, Mouser Part Number=511-ECMF02-2AMX6, RS Part Number=8805276, Datasheet Link=http://www.st.com/content/ccc/resource/technical/document/datasheet/3a/28/cf/d0/31/63/48/8c/CD00282307.pdf/files/CD00282307.pdf/jcr:content/translations/en.CD00282307.pdf, Height=0.55mm, Manufacturer_Part_Number=ECMF02-2AMX6, Mouser Price/Stock=https://www.mouser.com/Search/Refine.aspx?Keyword=511-ECMF02-2AMX6, RS Price/Stock=https://uk.rs-online.com/web/p/products/8805276
IC8: library part CMP-0248-00010-2, "USB to Basic UART Interface Chip, UHCI/OHCI/EHCI Compatible, USB 2.0 Compatible, -40 to +85 degC, 16-Pin QFN, Pb-Free, Tape and Reel", Manufacturer=FTDI, Code_JEDEC=MO-220WGGC, ComponentLink1Description="Manufacturer URL", ComponentLink1URL=http://www.ftdichip.com/, ComponentLink2Description=Datasheet, ComponentLink2URL=http://www.ftdichip.com/Support/Documents/DataSheets/ICs/DS_FT230X.pdf, ComponentLink3Description="FT230X Product Page", ComponentLink3URL=www.ftdichip.com/Products/ICs/FT230X.html, DatasheetVersion="ver 1.2, Feb-2013", PackageDescription="16-Pin Quad Flat No-Lead, 4x4 mm Body, 0.65 mm Pitch", PackageReference=QFN-16, PackageVersion=Feb-13, PartNumber=FT230XQ-R, RevisionNote="DatasheetVersion updated to 1.2 Feb-2013"
IC10: library part CMP-2000-07574-1, "Low Noise, Low Drift, Low Power, 3-Axis MEMS Accelerometer, 2.25 to 3.6 V, -40 to 125 degC, 14-Pin LCC (E-14-1), RoHS, Tray", Manufacturer="Analog Devices", Package Description="14-Pin Leadless Chip Carrier Package, Body 6.0 x 6.0 mm, Pitch 1.27 mm", Package Reference=E-14-1, Datasheet URL=http://www.analog.com/media/en/technical-documentation/data-sheets/ADXL354_355.pdf, Datasheet Version="Rev. 0, 09/2016", Lead Free=ContainsLead, Manufacturer URL=http://www.analog.com/, Mounting Technology=SurfaceMount, Number of Pins=14, RoHSCompliant=False
IC11: library part CMP-2000-07537-1, "Small, low Power Inertial Measurement Unit, 1.2 to 3.6 V, -40 to 85 degC, 14-Pin LGA, Halogen-Free, Tape and Reel", Manufacturer=Bosch, Package Description="14-Pullback Quad Flat No-Lead, Body 3 x 2.5 mm, Pitch 0.5 mm", Datasheet URL=https://ae-bst.resource.bosch.com/media/_tech/media/datasheets/BST-BMI160-DS000-07.pdf, Datasheet Version="Rev. 0.8, 02/2015", Lead Free=LeadFree, Manufacturer URL=https://www.bosch.com/, Mounting Technology=SurfaceMount, Package Reference=BMI160, RoHSCompliant=false
L1: library part CMP-2000-06590-1, "Chip Inductor, 1.8 nH, +/- 0.1 nH, 280 mA, -40 to 85 degC, 0402 (1005 Metric), RoHS, Tape and Reel", Case Size/Dimension=0402, DC Resistance=0.2O, Inductance-Nom=1.8nH, Manufacturer=Murata, Package Description="2-Pin Surface Mount Device, Body 1 x 0.5 mm", Rated Current-Max=280mA, Tolerance (nH)=±0.1nH, Datasheet URL=http://search.murata.co.jp/Ceramy/image/img/PDF/ENG/L0075S0084LQP15M.pdf, Datasheet Version=09/2010, Manufacturer URL=http://www.murata.com/, Mounting Technology=SurfaceMount, Package Reference=0402
L2: library part CMP-0220-00044-1, "SMD EMI Suppression Ferrite Bead WE-CBF, Z = 33 Ohm", ComponentLink1Description="Manufacturer Link", ComponentLink1URL=http://www.we-online.com, ComponentLink2Description=Datasheet, ComponentLink2URL=http://www.we-online.de/katalog/media/pdf/742792012.pdf, DatasheetVersion=Dec-2005, Impedance="33 Ohm", PackageDescription="Chip Inductor, 2-Leads, Body 2.0 x 1.2 mm", PackageReference=SMD-0805, PackageVersion=2005
LED1 LED2 LED3 LED4 LED5: library part LED, "Generic 0402 LED"
R1 R2 R3 R9 R23 R24: library part CMP-1011-00623-1, "10K 0.063W 1% 0402 (1005 Metric)  SMD", Case-EIA=0402, Case-Metric=1005, Power="0.063 W", Tolerance="1 %", Technology=SMT
R4 R20 R22: library part CMP-1011-00001-1, "Jumper 0402 (1005 Metric)", Case-EIA=0402, Case-Metric=1005, Power=None, Technology=SMT, Tolerance=None
R5 R6 R8 R17 R18: library part CMP-1011-00086-1, "3K3 0.063W 5% 0402 (1005 Metric)  SMD", Case-EIA=0402, Case-Metric=1005, Power="0.063 W", Tolerance="5 %", Technology=SMT
R7: library part CMP-1011-00518-1, "1K2 0.063W 1% 0402 (1005 Metric)  SMD", Case-EIA=0402, Case-Metric=1005, Power="0.063 W", Tolerance="1 %", Technology=SMT
R10: library part Resistor
R11: library part CMP-1011-00082-1, "2K2 0.063W 5% 0402 (1005 Metric)  SMD", Case-EIA=0402, Case-Metric=1005, Power="0.063 W", Tolerance="5 %", Technology=SMT
R12: library part CMP-1011-00062-1, "330R 0.063W 5% 0402 (1005 Metric)  SMD", Case-EIA=0402, Case-Metric=1005, Power="0.063 W", Tolerance="5 %", Technology=SMT
R13 R14: library part CMP-1011-00928-1, "4M99 0.063W 1% 0402 (1005 Metric)  SMD", Case-EIA=0402, Case-Metric=1005, Power="0.063 W", Tolerance="1 %", Technology=SMT
R15: library part CMP-1011-00699-1, "47K 0.063W 1% 0402 (1005 Metric)  SMD", Case-EIA=0402, Case-Metric=1005, Power="0.063 W", Tolerance="1 %", Technology=SMT
R16: library part CMP-1011-00665-1, "24K3 0.063W 1% 0402 (1005 Metric)  SMD", Case-EIA=0402, Case-Metric=1005, Power="0.063 W", Tolerance="1 %", Technology=SMT
R19 R21: library part CMP-1011-00036-1, "27R 0.063W 5% 0402 (1005 Metric)  SMD", Case-EIA=0402, Case-Metric=1005, Power="0.063 W", Tolerance="5 %", Technology=SMT
Y1: library part NX2016SA
Y2: library part CMP-2100-03637-1, "Crystal Unit, 32 to 77.5 KHz, 0.5 uW, -40 to 85 degC, 2-Pin SMD, RoHS", Manufacturer=Epson, Package Description="2-Pin Surface Mount Device, Body 3.2 x 1.5 mm", Package Reference=FC-135, Datasheet URL=http://www5.epsondevice.com/en/products/khz_range/fc135r.html#, Datasheet Version=42036.0, Manufacturer URL=https://www.eea.epson.com/, RoHSCompliant=false

## Via types
v1: diameter 0.4/0.45/0.4 (per signal layer), hole 0.2, L1 to L4, 143 vias
v2: diameter 0.5, hole 0.2, L1 to L4, 16 vias
v3: diameter 0.4/0.45/0.4 (per signal layer), hole 0.2, L1 to L4, tented both sides, 6 vias

## Nets (pads, with @x,y where several pads share a name; then routed paths per layer and width w, separated by ;. In a path a pad name is that pad's centre, name@x,y a point inside that pad or via, vN(x,y) a via of type N, cw(c..) or ccw(c..) an arc to the next point about the centre after c; other vN are vias at no path point)
+3V3: C1.2 C2.2 C3.2 C4.2 C5.2 C22.2 C29.2 C30.1 C31.1 C37.1 C38.2 C39.1 C40.2 C41.2 C42.2 C43.2 C44.2 IC1.13 IC1.22 IC1.34 IC1.44 IC6.5 IC6.6 IC8.1 IC8.9 IC9.6 IC9.12 IC10.5 IC10.11 IC11.5 IC11.8 IC11.12 IC12.1 IC12.6 IC12.10 LED1.ANODE LED2.ANODE R1.2 R2.2 R3.2 R23.2 R24.2 | length 34.1
  L1 w0.254: LED2.ANODE@25.25,10.8 25.25,13.455 24.981,13.723 24.981,15.453 27.58,18.052 27.957,18.052 27.994,18.015 28.397,18.015 C2.2@28.53,17.882 IC1.22@29.404,17.882 ; v1(29.23,23.375) C1.2@28.705,23.375 28.705,23.175 28.828,23.052 28.829,23.052 29.241,22.64 29.241,22.389 29.248,22.382 IC1.13@29.404,22.382 ; IC1.34@34.554,16.232 34.561,16.225 34.561,15.77 34.615,15.717 34.615,15.605 C3.2@34.878,15.342 35.011,15.475 35.301,15.475 35.37,15.544 v1(35.41,15.544) ; IC1.44@36.204,20.382 36.211,20.375 36.545,20.375 36.925,19.995 36.925,19.985 37.058,19.852 37.18,19.852 37.549,19.483 37.657,19.483 C4.2@37.79,19.35 v1(38.25,19.35) ; IC10.5@39.18,11.26 39.18,11.82 39.882,12.522 40,12.522 v1(40.028,12.55) ; v1(39.875,18.925) 39.898,18.902 39.898,18.34 IC11.5@39.9,18.338 ; IC11.12@40.9,20.363 40.9,20.545 40.902,20.547 41.297,20.547 v1(41.325,20.575) ; v1(41.474,18.115) 41.502,18.143 41.502,18.598 41.504,18.6 IC11.8@41.662,18.6 ; v1(42.46,16.55) 42.477,16.533 42.477,16.178 42.69,15.965 IC10.11@43.25,15.965 ; IC9.12@42.6,19.05 42.747,19.05 42.78,19.017 42.899,19.017 v1(42.927,18.989) ; v1(43.469,18.713) 43.497,18.685 43.618,18.685 43.653,18.65 IC9.6@43.8,18.65
  L4 w0.2: v1(17.525,14.55) C29.2@17.525,15.278 IC8.1@19.575,15.278
  L4 w0.254: v1(21.525,10.649) IC8.9@21.525,11.328 ; v1(37.81,16.97) 37.782,16.942 37.737,16.942 37.677,16.882 37.677,16.762 C44.2@37.41,16.495 37.53,16.375 IC12.10@38.202,16.375 ; v1(38.17,17.45) 38.198,17.422 38.592,17.422 C43.2@38.715,17.3 IC12.1@38.715,16.638 ; IC12.6@39.215,15.112 39.223,15.112 39.465,14.871 39.615,14.871 v1(39.643,14.843) ; C41.2@39.78,19.4 39.847,19.333 39.847,18.953 v1(39.875,18.925) ; v1(40.028,12.55) 40.028,12.51 40.083,12.456 40.083,11.905 C38.2@40.088,11.9 C37.1@40.088,11.045 ; C39.1@40.875,16.92 C40.2@41.8,16.92 41.933,16.787 42.183,16.787 42.42,16.55 v1(42.46,16.55) ; v1(41.474,18.115) 41.474,18.155 41.517,18.198 41.517,18.522 C42.2@41.65,18.655 ; C31.1@42.925,19.588 42.926,19.587 v1(42.927,18.989) v1(42.927,18.989) ; v1(43.469,18.713) 43.497,18.741 43.856,18.741 C30.1@43.89,18.775
  other v1: 27.89,18.08 36.182,22.852 24.578,23.201 26.276,23.201 24.578,23.826 26.276,23.826
+3V6: C17.2 C18.2 C21.2 IC5.6 IC6.1 IC6.2 R15.2